# Altium PCB demo.PcbDoc
Units mm, origin at the board's own origin, x right, y up, seen from the top; angles counter-clockwise.
Board outline 100 x 100 mm, 2 copper layers (Top Layer, Bottom Layer); 59 components, 69 nets, 272 pads, 63 vias.
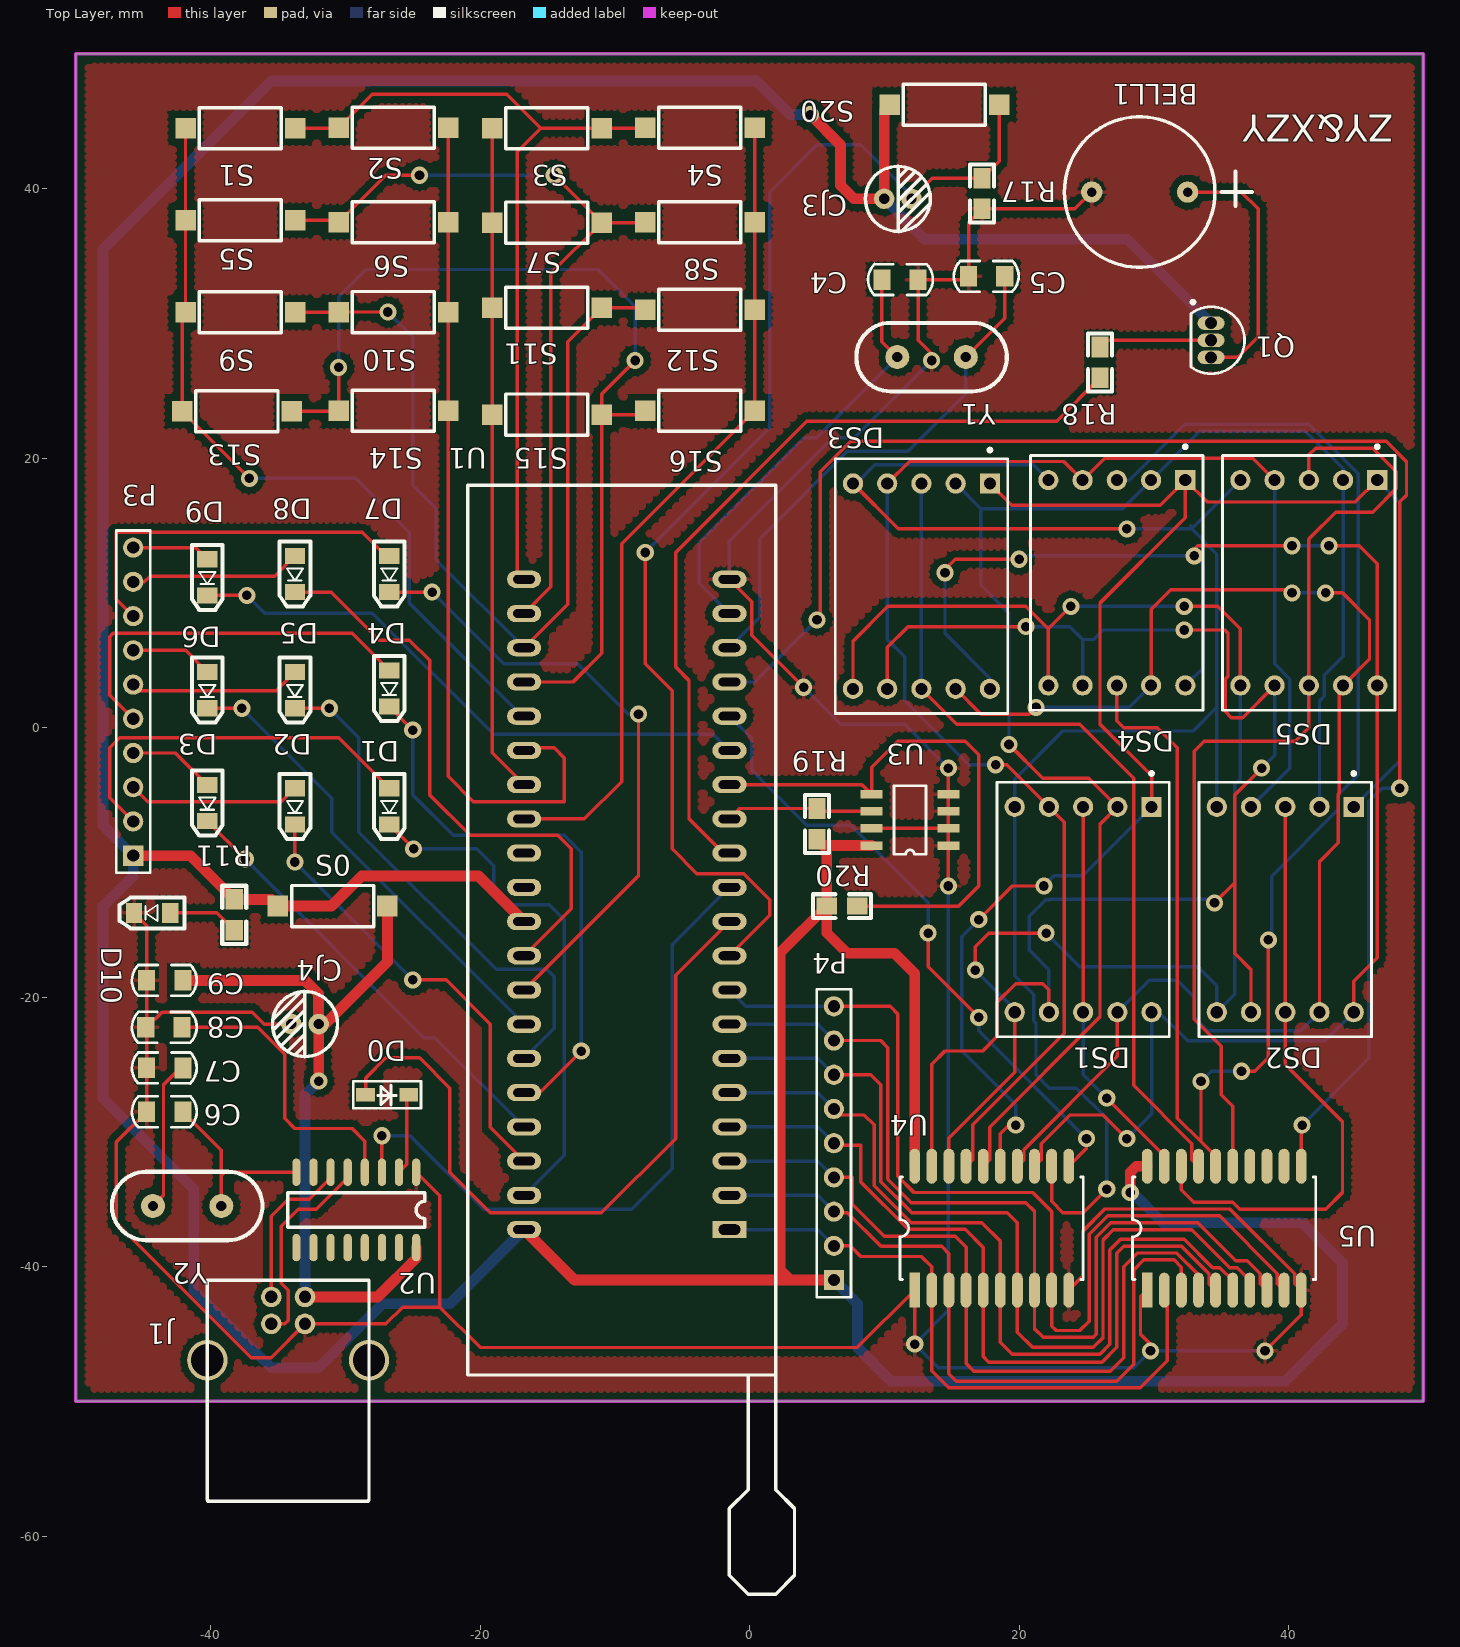
[diagram p0: Top Layer view]
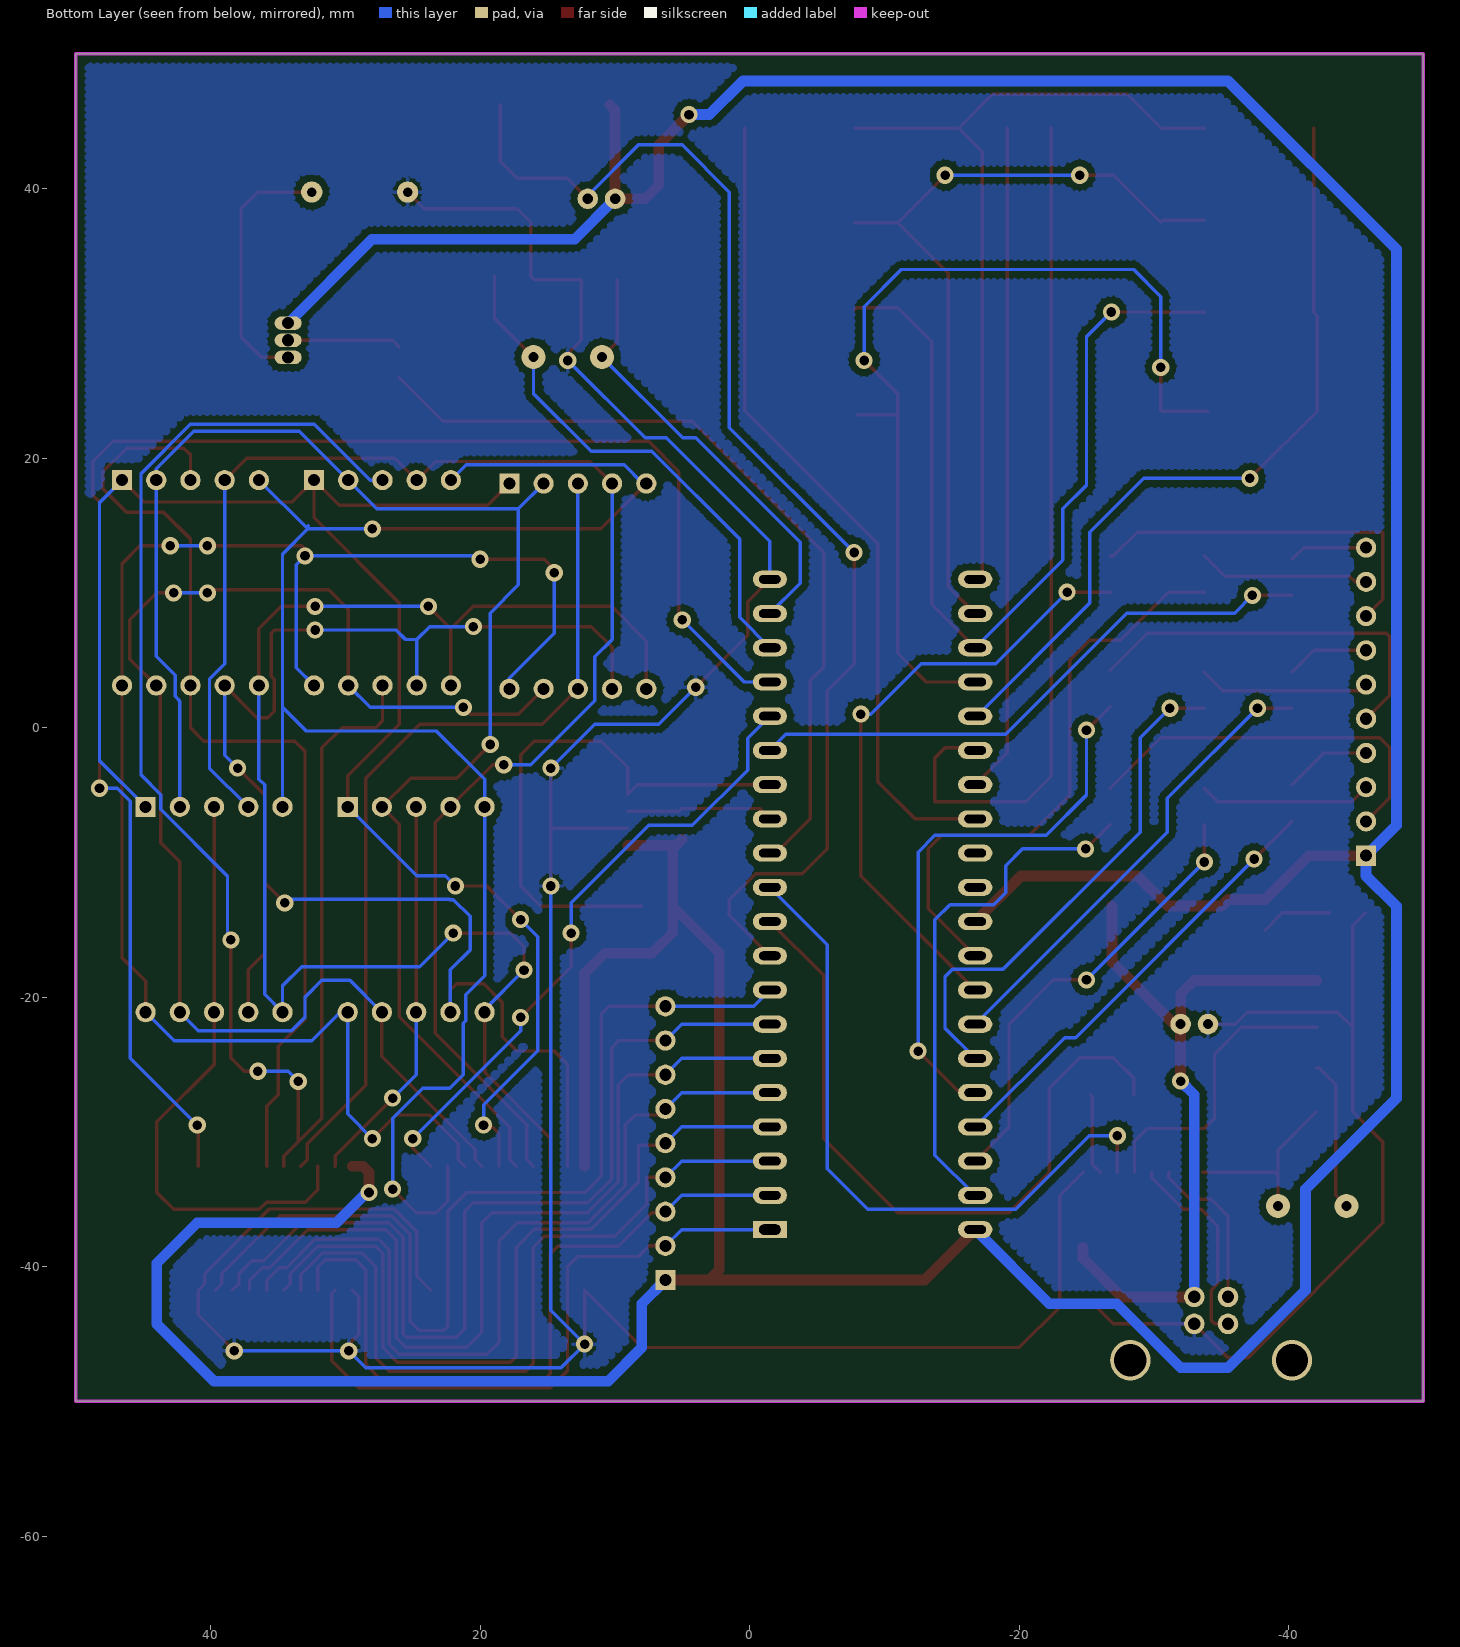
[diagram p1: Bottom Layer view, seen from below]

## Layer stack, top to bottom
Top Layer: signal copper 0.0356
Dielectric: dielectric 0.32, FR-4, Dk 4.8
Bottom Layer: signal copper 0.0356

## Board outline
-50,-50 50,-50 50,50 -50,50

## Design rules (kind name [scope] priority, off if disabled: settings)
Clearance INPOLY [InPoly] p1: gap=0.5
Clearance Clearance_1 [All] p2: gap=0.254
FabricationTestpoint [(IsPad And (OnTopLayer Or OnBottomLayer))] p1: side=3 testpointundercomponent=TRUE minsize=1.016 maxsize=2.54 preferedsize=1.524 minholesize=0 maxholesize=1.016 preferedholesize=0.813 testpointgrid=0.025 allowsidetop=TRUE allowsidebottom=TRUE usegrid=TRUE gridtolerance=0
PolygonConnect [All] p1: connectstyle=Relief reliefconductorwidth=0.254 reliefentries=4 polygonreliefangle="90 Angle" airgapwidth=0.254
RoutingVias [All] p1: holewidth=0.711 width=1.27 viastyle="Through Hole" minholewidth=0.711 minwidth=1.27 maxholewidth=0.711 maxwidth=1.27
SolderMaskExpansion [All] p1: expansion=0.102
Width VCC [InNet('VCC')] p1: maxlimit=2 minlimit=0.254 preferedwidth=0.8
Width +5 [InNet('+5V')] p2: maxlimit=2 minlimit=0.254 preferedwidth=0.8
Width [All] p3: maxlimit=0.254 minlimit=0.1 preferedwidth=0.254
27 further rules are at their usual default settings.

## Components (designator, comment, footprint, x,y, rotation, side; value= is the part's Value field where it differs from the comment)
BELL1 "BELL" BELL 32.5,39.75 r0 top
C4 "Cap" 0805C 12.5,33.25 r180 top
C5 "Cap" 0805C 16.25,33.5 r0 top
C6 "Cap" 0805C -44.75,-28.5 r0 top
C7 "Cap" 0805C -44.75,-25.25 r0 top
C8 "0.01UF" 0805C -42.135,-22.25 r180 top
C9 "0.1UF" 0805C -44.75,-18.75 r0 top
CJ3 "" RB10U 11,39.25 r0 top
CJ4 "" RB10U -33,-22 r180 top
D0 "Diode 1N4148" SOD123F -28.5,-27.25 r0 top
D1 "LED0" 0805-LED -26.75,-4.5 r90 top
D2 "LED0" 0805-LED -33.75,-4.5 r90 top
D3 "LED0" 0805-LED -40.25,-4.25 r90 top
D4 "LED0" 0805-LED -26.75,4.25 r90 top
D5 "LED0" 0805-LED -33.75,4.125 r90 top
D6 "LED0" 0805-LED -40.25,4.125 r90 top
D7 "LED0" 0805-LED -26.75,12.75 r90 top
D8 "LED0" 0805-LED -33.75,12.75 r90 top
D9 "LED0" 0805-LED -40.25,12.5 r90 top
D10 "LED0" 0805-LED -43,-13.75 r0 top
DS1 "Dpy Blue-CA" H 24.75,-13.5 r180 top
DS2 "Dpy Blue-CA" H 39.75,-13.5 r180 top
DS3 "Dpy Blue-CA" H 12.75,10.5 r180 top
DS4 "Dpy Blue-CA" H 27.25,10.75 r180 top
DS5 "Dpy Blue-CA" H 41.5,10.75 r180 top
J1 "USB" USB-B -33,-42.25 r90 top
P3 "1k" HDR1X10 -45.75,-9.5 r90 top
P4 "10K" HDR1X9 6.25,-41 r90 top
Q1 "2N3906" TO-92A 34.25,28.75 r180 top
R11 "Res2" 0805 -38.25,-12.75 r270 top
R17 "Res2" 0805 17.25,38.5 r90 top
R18 "Res2" 0805 26,28.25 r270 top
R19 "10K" 0805 5,-6 r270 top
R20 "10K" 0805 8,-13.25 r180 top
S0 "SW-SPST" SWD -35,-13.25 r0 top
S1 "" SWD -33.75,44.5 r180 top
S2 "" SWD -30.5,44.5 r0 top
S3 "" SWD -11,44.5 r180 top
S4 "" SWD -7.75,44.5 r0 top
S5 "" SWD -33.75,37.667 r180 top
S6 "" SWD -30.5,37.5 r0 top
S7 "" SWD -11,37.5 r180 top
S8 "" SWD -7.75,37.5 r0 top
S9 "" SWD -33.75,30.833 r180 top
S10 "" SWD -30.5,30.833 r0 top
S11 "" SWD -11,31.167 r180 top
S12 "" SWD -7.75,31 r0 top
S13 "" SWD -34,23.5 r180 top
S14 "" SWD -30.5,23.5 r0 top
S15 "" SWD -11,23.25 r180 top
S16 "" SWD -7.75,23.5 r0 top
S20 "" SWD 18.5,46.25 r180 top
U1 "AT89C51" DIP40紧锁座 -1.5,-37.25 r180 top
U2 "CH340G" SO-16 -24.75,-33 r270 top
U3 "24C02" SOP-8 14.75,-8.75 r180 top
U4 "74573" SO20W 12.25,-41.75 r90 top
U5 "74573" SO20W 29.5,-41.75 r90 top
Y1 "11.0592MHZ" XTAL 13.5,27.5 r180 top
Y2 "12MHZ" XTAL -41.75,-35.5 r0 top

## Footprints (in the part's own frame and the unit in brackets; to place one, negate y for a bottom-side part, rotate by r counter-clockwise, add the part's x,y. Pads: shape width x height; smd on the part's side, far side on the other; paste and mask are expansions set on the pad)
0805 [mil]
  rect 60x50 smd: 1(0,0) 2(90,0)
  silkscreen extent -40,-35 130,35
0805-LED [mm]
  rect 1.2x1.5 smd: 1(0,0) 2(-2.686,0)
  silkscreen extent -3.76,-1.14 1.07,1.14
0805C [mil]
  rect 50x60 smd: 1(0,0) 2(105.71,-0.32)
  silkscreen extent -43,-45 146,45
BELL [mil]
  round 62 hole 28: 1(0,0) 2(-280,0)
  silkscreen extent -360,-220 188,220
DIP40紧锁座 [mil]
  rect 100x50 hole 30 slot 62.99 at 0 deg: 1(0,0)
  oval 100x50 hole 25 slot 62.99 at 0 deg: 2(0,-100) 3(0,-200) 4(0,-300) 5(0,-400) 6(0,-500) 7(0,-600) 8(0,-700) 9(0,-800) 10(0,-900) 11(0,-1000) 12(0,-1100) 13(0,-1200) 14(0,-1300) 15(0,-1400) 16(0,-1500) 17(0,-1600) 18(0,-1700) 19(0,-1800) 20(0,-1900) 21(600,-1900) 22(600,-1800) 23(600,-1700) 24(600,-1600) 25(600,-1500) 26(600,-1400) 27(600,-1300) 28(600,-1200) 29(600,-1100) 30(600,-1000) 31(600,-900) 32(600,-800) 33(600,-700) 34(600,-600) 35(600,-500) 36(600,-400) 37(600,-300) 38(600,-200) 39(600,-100) 40(600,0)
  silkscreen extent -190,-2175 765,1065
H [mm] "LED, 7-Segment Display, 14.2 mm, RHD; 10 Leads; Row Space 15.24 mm; Pitch 2.54 mm"
  rect 1.5x1.5 hole 0.9: 1(-5.08,-7.62)
  round 1.5 hole 0.9: 2(-2.54,-7.62) 3(0,-7.62) 4(2.54,-7.62) 5(5.08,-7.62) 6(5.08,7.62) 7(2.54,7.62) 8(0,7.62) 9(-2.54,7.62) 10(-5.08,7.62)
  silkscreen extent -6.4,-10.22 6.4,9.45, body extent -6.4,-9.45 6.4,9.45, height 8.25
HDR1X9 [mm] "Connector; Header; 9 Position"
  rect 1.5x1.5 hole 0.9: 1(0,0)
  round 1.5 hole 0.9: 2(2.54,0) 3(5.08,0) 4(7.62,0) 5(10.16,0) 6(12.7,0) 7(15.24,0) 8(17.78,0) 9(20.32,0)
  silkscreen extent -1.27,-1.27 21.59,1.27
HDR1X10 [mm] "Connector; Header; 10 Position"
  rect 1.5x1.5 hole 0.9: 1(0,0)
  round 1.5 hole 0.9: 2(2.54,0) 3(5.08,0) 4(7.62,0) 5(10.16,0) 6(12.7,0) 7(15.24,0) 8(17.78,0) 9(20.32,0) 10(22.86,0)
  silkscreen extent -1.27,-1.27 24.13,1.27
RB10U [mil]
  round 60 hole 30: 1(-40,0) 2(40,0)
  silkscreen extent -95,-96 95,95
SO20W [mm]
  rect 2.6x0.8 smd: 1(0,0)
  oval 2.6x0.8 smd: 2(0,-1.27) 3(0,-2.54) 4(0,-3.81) 5(0,-5.08) 6(0,-6.35) 7(0,-7.62) 8(0,-8.89) 9(0,-10.16) 10(0,-11.43) 11(9.2,-11.43) 12(9.2,-10.16) 13(9.2,-8.89) 14(9.2,-7.62) 15(9.2,-6.35) 16(9.2,-5.08) 17(9.2,-3.81) 18(9.2,-2.54) 19(9.2,-1.27) 20(9.2,0)
  silkscreen extent 0.8,-12.51 8.4,1.09
SO-16 [mil]
  oval 80x24 smd: 1(0,0) 2(0,-50) 3(0,-100) 4(0,-150) 5(0,-200) 6(0,-250) 7(0,-300) 8(0,-350) 9(220,-350) 10(220,-300) 11(220,-250) 12(220,-200) 13(220,-150) 14(220,-100) 15(220,-50) 16(220,0)
  silkscreen extent 60,-375 160,25
SOD123F [mm]
  rect 1.4x1 smd: 1(0,0) 2(3.2,0)
  silkscreen extent -0.91,-1 4.11,1
SOP-8 [mil]
  rect 65x25 smd: 1(0,0) 2(0,-50) 3(0,-100) 4(0,-150) 5(224.41,-150) 6(224.41,-100) 7(224.41,-50) 8(224.41,0)
  silkscreen extent 65,-175 159,25
SWD [mil]
  rect 60x60 smd: 1(-0.4,0.5) 2(319.6,0.5)
  silkscreen extent 40,-60 280,60
TO-92A [mm] "TO, Flat Index; 3 In-Line, Axial Leads; Body Dia. 4.5mm; Leads 0.51 x 0.48 mm (max)"
  oval 2x1 hole 0.9: 1(0,-1.27) 2(0,0) 3(0,1.27)
  silkscreen extent -2.48,-2.95 1.5,2.48, body extent -2.5,-2.5 1.5,2.5, height 6.86
USB-B [mm]
  round 1.524 hole 0.92: 1(0,0) 2(0,2.5) 3(-2,2.5) 4(-2,0)
  round 3 hole 2.4: 5(-4.7,7.25) 6(-4.7,-4.75)
  silkscreen extent -15.15,-4.75 1.22,7.25
XTAL [mil]
  round 70 hole 30: 1(-100,0) 2(100,0)
  silkscreen extent -220,-100 220,100

## Part data
C4 C5 C6 C7: "Capacitor"
C8 C9: library part Cap, "Capacitor"
CJ3 CJ4: library part "Cap Pol1", "Polarized Capacitor (Radial)"
D0: "High Conductance Fast Diode"
D1 D2 D3 D4 D5 D6 D7 D8 D9 D10: "Typical INFRARED GaAs LED"
DS1 DS2 DS3 DS4 DS5: "14.2 mm General Purpose Blue 7-Segment Display: CA, RH DP, Gray Surface"
P3: library part "Header 10", "Header, 10-Pin"
P4: library part "Header 9", "Header, 9-Pin"
Q1: "PNP General Purpose Amplifier"
R11 R17 R18: "Resistor"
R19 R20: library part Res2, "Resistor"
S0: "Single-Pole, Single-Throw Switch"
S1 S2 S3 S4 S5 S6 S7 S8 S9 S10 S11 S12 S13 S14 S15 S16 S20: library part SW-PB, "Switch"
U2: "USB2UART"
Y1 Y2: library part XTAL, "Crystal Oscillator"

## Via types
v1: diameter 1.27, hole 0.711, Top Layer to Bottom Layer, 63 vias

## Nets (pads, with @x,y where several pads share a name; then routed paths per layer and width w, separated by ;. In a path a pad name is that pad's centre, name@x,y a point inside that pad or via, vN(x,y) a via of type N, cw(c..) or ccw(c..) an arc to the next point about the centre after c; other vN are vias at no path point)
+5V: C9.2 CJ4.1 J1.1 S0.2 U2.16 | length 55.5
  Top Layer w0.8: C9.2 -32.992,-18.758 -32,-19.75 -32,-22.484 CJ4.1@-31.984,-22.468 ; J1.1 -27.615,-42.25 -24.75,-39.385 U2.16 ; v1(-31.984,-26.234) CJ4.1@-31.984,-22.468 ; CJ4.1 CJ4.1@-31.984,-22.468 ; S0.2 -26.882,-17.366 CJ4.1@-31.984,-22.468
  Bottom Layer w0.8: J1.1 -33,-27.25 v1(-31.984,-26.234)
A: DS1.7 DS2.7 DS3.7 DS4.7 DS5.7 U4.19 | length 116.9
  Top Layer w0.254: DS3.7 10.21,5.96 11.75,7.5 v1(20.5,7.5) ; U4.19 13.52,-24.98 14.5,-24 17.3,-24 18.35,-22.95 18.35,-20.4 19.75,-19 21.75,-19 22.21,-19.46 DS1.7 ; v1(32.25,7.25) 35.25,7.25 35.5,7 35.5,3.809 35.289,3.598 35.289,1.211 35.75,0.75 36.58,0.75 DS5.7 ; v1(34.5,-13) 36,-11.5 ; DS2.7 37.21,-17.96 36,-16.75 36,-11.5 ; v1(38,-3) 36,-5 36,-11.5
  Bottom Layer w0.254: v1(20.5,7.5) 20.5,7 21,7.5 23.75,7.5 24.71,6.54 ; DS1.7 22.21,-17.96 20.75,-16.5 20.75,-14 21.984,-12.766 22.257,-12.766 22.273,-12.75 34.25,-12.75 v1(34.5,-13) ; DS4.7 24.71,6.54 ; v1(32.25,7.25) 26.25,7.25 25.54,6.54 24.71,6.54 ; v1(38,-3) 38.96,-2.04 DS5.7
B: DS1.6 DS2.6 DS3.6 DS4.6 DS5.6 U4.18 | length 110.2
  Top Layer w0.254: DS3.6 7.67,6.42 10.25,9 20.5,9 22.17,7.33 ; U4.18 14.79,-30.46 19.67,-25.58 DS1.6 ; v1(16.75,-18) 16.75,-16.25 17.75,-15.25 v1(22,-15.25) ; DS4.6 22.17,7.33 ; v1(23.84,9) 22.17,7.33 ; v1(32.25,9) 34.75,9 36.42,7.33 DS5.6
  Bottom Layer w0.254: v1(16.75,-18) 19.67,-20.92 DS1.6 ; v1(22,-15.25) 24.5,-17.75 33.25,-17.75 34.67,-19.17 DS2.6 36,-19.79 36,-4.25 36.42,-3.83 DS5.6 ; v1(23.84,9) v1(32.25,9)
C: DS1.4 DS2.4 DS3.4 DS4.4 DS5.4 U4.17 | length 118.2
  Top Layer w0.254: DS3.4 11.84,19.75 23.33,19.75 DS4.4 26.34,20 37.33,20 DS5.4 ; U4.17 16.549,-32.061 16.549,-29.483 23.341,-22.691 23.341,-7.011 DS1.4 ; v1(18.25,-2.75) 19.08,-2.75 DS1.4 ; DS1.4@22.37,-5.88 DS1.4
  Bottom Layer w0.254: DS3.4 10.21,6.54 11.5,5.25 11.5,2 16.25,-2.75 v1(18.25,-2.75) ; DS2.4 40.091,-2.999 40.091,3.598 38.96,4.729 DS5.4
CH_D+: J1.3 U2.5 | length 15.4
  Top Layer w0.254: J1.3 -34.5,-44.25 -34.25,-44 -34.25,-41.75 -34.75,-41.25 -34.75,-37 -33.5,-35.75 -32.169,-35.75 -29.83,-33.411 U2.5
CH_D-: J1.2 U2.6 | length 12
  Top Layer w0.254: J1.2 -35.5,-36.25 -34.25,-35 -32.689,-35 -31.1,-33.411 U2.6
CH_TXD: D0.2 U2.2 | length 6
  Top Layer w0.254: U2.2 -25.436,-32.416 -25.436,-27.386 D0.2
D: DS1.2 DS2.2 DS3.2 DS4.2 DS5.2 U4.16 | length 118
  Top Layer w0.254: U4.16 17.819,-32.061 17.819,-29.65 26,-21.469 26,-7.17 DS1.2 25.16,-3.75 21.75,-3.75 v1(19.25,-1.25)
  Bottom Layer w0.254: DS3.2 17.16,16.25 ; v1(19.25,-1.25) 19.25,8.5 17.16,10.59 17.16,16.25 ; DS2.2 42.29,1.979 42.631,2.321 42.631,3.881 44.04,5.29 DS5.2 44.04,19.21 41.25,22 33.42,22 DS4.2 27.67,16.25 17.16,16.25
DP: DS1.5 DS2.5 DS3.5 DS4.5 DS5.5 U4.12 | length 128.2
  Top Layer w0.254: DS3.5 11.04,14.75 v1(28,14.75) ; U4.12 22.41,-35.16 23.25,-36 24.75,-36 v1(26.5,-34.25)
  Bottom Layer w0.254: DS3.5 7.92,18.12 9.3,19.5 21.04,19.5 DS4.5 ; v1(26.5,-34.25) 26.5,-29 24.25,-26.75 22.25,-26.75 21.25,-25.75 21.25,-21.93 21.079,-21.759 21.079,-19.829 19.67,-18.42 DS1.5 19.67,-3.83 23.25,-0.25 32.92,-0.25 34.67,1.5 ; v1(28,14.75) 32.75,14.75 ; 32.75,15 32.8,14.95 32.8,14.75 ; DS2.5 34.67,1.5 ; DS5.5 32.8,14.75 ; 32.8,14.75 34.67,12.88 34.67,1.5
DS1: DS1.3 DS1.8 U5.19 | length 29.2
  Top Layer w0.254: DS1.8 DS1.3 ; v1(26.5,-27.5) 30.77,-31.77 U5.19
  Bottom Layer w0.254: DS1.8 24.75,-25.75 v1(26.5,-27.5)
DS2: DS2.3 DS2.8 U5.18 | length 45.2
  Top Layer w0.254: U5.18 32.04,-34.29 32.968,-35.218 35.851,-35.218 36.383,-35.75 42.75,-35.75 44,-34.5 44,-29.25 39.75,-25 DS2.8 DS2.3
DS3: DS3.3 DS3.8 U5.17 | length 64.5
  Top Layer w0.254: DS3.8 15.38,0.25 24.5,0.25 28.5,-3.75 28.5,-26.548 32.821,-30.869 32.821,-32.061 U5.17
  Bottom Layer w0.254: DS3.8 DS3.3
DS4: DS4.3 DS4.8 U5.16 | length 117.8
  Top Layer w0.254: DS4.8 27.25,0.5 27.75,0 30.25,0 31.75,-1.5 31.75,-28.986 33.5,-30.735 ; v1(33.5,-26.25) 33.5,-30.735 ; U5.16 34.58,-31.815 33.5,-30.735 ; v1(36.5,-25.5) 37.5,-25.5 38.5,-24.5 v1(38.5,-15.75)
  Bottom Layer w0.254: DS4.3 28.161,18.37 32.299,22.508 41.501,22.508 45.171,18.838 45.171,-3.5 43.699,-4.972 43.699,-6.07 38.75,-11.019 38.75,-15.75 v1(38.5,-15.75) ; v1(33.5,-26.25) 34.25,-25.5 v1(36.5,-25.5)
DS5: DS5.3 DS5.8 U5.15 | length 73.8
  Top Layer w0.254: U5.15 35.85,-28.1 35,-27.25 35,-23.65 33,-21.65 33,-1.75 33.75,-1 40.5,-1 41.5,0 DS5.8 41.5,14 43.5,16 46.249,16 48,17.751 48,18.989 46.239,20.75 42,20.75 41.5,20.25 DS5.3
E: DS1.1 DS2.1 DS3.1 DS4.1 DS5.1 U4.15 | length 124.1
  Top Layer w0.254: v1(17,-14.25) 19.5,-11.75 v1(21.836,-11.75) ; DS3.1 19.45,16.5 30.46,16.5 DS4.1 ; U4.15 18.6,-30.15 19.5,-29.25 v1(19.75,-29.5) ; DS1.1 29.83,-3.58 26,0.25 26,9.25 32.33,15.58 DS4.1 ; DS5.1 44.96,16.75 33.95,16.75 DS4.1
  Bottom Layer w0.254: v1(17,-14.25) 15.734,-15.516 15.734,-23.984 19.75,-28 v1(19.75,-29.5) ; v1(21.836,-11.75) 22.586,-11 24.71,-11 DS1.1 ; DS2.1 48.25,-2.46 48.25,16.7 DS5.1
F: DS1.9 DS2.9 DS3.9 DS4.9 DS5.9 U4.14 | length 104.2
  Top Layer w0.254: DS3.9 17.17,1 20.75,1 v1(21.25,1.5) ; U4.14 20.359,-32.061 20.359,-31.326 27.29,-24.395 DS1.9 ; DS4.9 29.79,8.79 31.25,10.25 40.5,10.25 v1(40.25,10) ; DS2.9 42.29,-9.96 43.699,-8.551 43.699,-4.921 43.75,-4.87 43.75,2.84 DS5.9 46,5.09 46,8 44,10 v1(42.75,10)
  Bottom Layer w0.254: v1(21.25,1.5) 28.16,1.5 DS4.9 ; DS1.9 29.66,-18.75 31.75,-18.75 33,-20 33,-21.5 34,-22.5 40.91,-22.5 DS2.9 ; v1(40.25,10) v1(42.75,10)
G: DS1.10 DS2.10 DS3.10 DS4.10 DS5.10 U4.13 | length 125.1
  Top Layer w0.254: v1(14.5,11.5) 14.5,11.75 15.25,12.5 v1(20,12.5) ; U4.13 21.629,-32.061 21.629,-30.871 23.75,-28.75 26.25,-28.75 v1(28,-30.5) ; v1(33,12.75) 33,13.25 33.25,13.5 v1(40.25,13.5) ; v1(43,13.5) 45.25,13.5 46.58,12.17 DS5.10 46.58,-17.07 44.83,-18.82 DS2.10
  Bottom Layer w0.254: v1(14.5,11.5) 14.5,7 17.83,3.67 DS3.10 ; v1(20,12.5) 20.25,12.75 v1(33,12.75) 33.65,12.1 33.65,4.45 DS4.10 ; v1(28,-30.5) 29.83,-28.67 DS1.10 30.37,-21.12 32.5,-23.25 42.7,-23.25 DS2.10 ; v1(40.25,13.5) v1(43,13.5)
GND: BELL1.2 C4.1 C5.1 C6.1 C7.1 C8.2 C9.1 CJ4.2 D10.2 J1.4 R17.1 U1.20 U2.1 U3.1 U3.2 U3.3 U3.4 U3.7 U4.1 U4.10 U5.1 U5.10 | length 301.8
  Top Layer w0.254: D10.2 -44.75,-14.686 C9.1 C8.2@-44.75,-22.242 ; CJ4.2 -36.032,-22 -36.925,-21.107 -43.615,-21.107 C8.2@-44.75,-22.242 ; U2.1 -23,-34.75 -23,-43 ; U1.20 0.151,9.359 0.151,6.849 v1(4,3) ; U3.7 U3.2 ; v1(12.25,-45.75) U4.1 8,-46 -20,-46 -23,-43 ; v1(13.5,27.25) 13.5,27.75 12.5,28.75 C4.1 16,33.25 C5.1 16.25,37.5 R17.1 24.138,38.5 BELL1.2 ; v1(14.75,-11.75) U3.1 U3.2 ; v1(14.75,-3) U3.4 U3.3 U3.2 ; U4.10 24.702,-40.728 24.702,-37.393 26.369,-35.726 35.641,-35.726 40.441,-40.526 40.441,-41.261 U5.10 40.93,-43.57 v1(38.25,-46.25) ; U5.1 29.008,-42.242 29.008,-45.008 29.75,-45.75 v1(29.75,-46.25) ; C8.2@-44.75,-22.242 C7.1 C6.1 -47,-30.75 -47,-36.75 -37,-46.75 -35.5,-46.75 J1.4 -27,-44.25 -25.75,-43 -23,-43
  Bottom Layer w0.254: U1.20 -1.5,13.821 6.179,21.5 7.75,21.5 v1(13.5,27.25) ; v1(4,3) 6.75,0.25 11.5,0.25 v1(14.75,-3) ; v1(14.75,-11.75) 14.75,-43.25 v1(12.25,-45.75) 14,-47.5 28.5,-47.5 v1(29.75,-46.25) v1(38.25,-46.25)
NetBELL1_1: BELL1.1 Q1.3 | length 19.4
  Top Layer w0.254: BELL1.1 36.5,39.75 37.75,38.5 37.75,29 36.23,27.48 Q1.3
NetC6_2: C6.2 U2.8 Y2.2 | length 13.8
  Top Layer w0.254: C6.2 -39.21,-31.363 -39.21,-33.25 ; Y2.2 -39.21,-33.25 ; U2.8 -38.96,-33 -39.21,-33.25
NetC7_2: C7.2 Y2.1 | length 11.3
  Top Layer w0.254: Y2.1 -43.5,-34.71 -43.5,-26.5 -42.258,-25.258 C7.2
NetC8_1: C8.1 U2.4 | length 22.2
  Top Layer w0.254: C8.1 -36.5,-22.25 -34.5,-24.25 -34.5,-29 -33.75,-29.75 -29.5,-29.75 -28.56,-30.69 U2.4
NetD1_1: D1.1 P3.2 | length 28.8
  Top Layer w0.254: P3.2 -47.5,-5.21 -47.5,-1.498 -46.751,-0.749 -30.501,-0.749 D1.1
NetD2_1: D2.1 P3.3 | length 12.9
  Top Layer w0.254: P3.3 -44.67,-5.5 -34.75,-5.5 D2.1
NetD3_1: D3.1 P3.4 | length 6.5
  Top Layer w0.254: P3.4 -42.62,-1.88 D3.1
NetD4_1: D4.1 P3.5 | length 28.8
  Top Layer w0.254: P3.5 -47.5,2.41 -47.5,6.75 -47.25,7 -29.5,7 D4.1
NetD5_1: D5.1 P3.6 | length 12.8
  Top Layer w0.254: P3.6 -45.3,2.75 -35.125,2.75 D5.1
NetD6_1: D6.1 P3.7 | length 6.2
  Top Layer w0.254: P3.7 -41.865,5.74 D6.1
NetD7_1: D7.1 P3.8 | length 27.7
  Top Layer w0.254: P3.8 -47,9.53 -47,14.5 -28.75,14.5 -27,12.75 D7.1
NetD8_1: D8.1 P3.9 | length 12.8
  Top Layer w0.254: P3.9 -44.93,10.82 -44.5,11.25 -35.25,11.25 D8.1
NetD9_1: D9.1 P3.10 | length 5.9
  Top Layer w0.254: P3.10 -41.11,13.36 D9.1
NetD10_1: D10.1 R11.2 | length 5.3
  Top Layer w0.254: D10.1 -39.536,-13.75 R11.2
NetQ1_2: Q1.2 R18.1 | length 8.5
  Top Layer w0.254: R18.1 26.5,28.75 Q1.2
P0.0: D1.2 U1.39 | length 38.8
  Top Layer w0.254: D1.2 v1(-24.936,-9)
  Bottom Layer w0.254: v1(-24.936,-9) -20.25,-9 -19,-10.25 -19,-12.25 -18.12,-13.13 -14.87,-13.13 -13.75,-14.25 -13.75,-31.72 U1.39
P0.1: D2.2 U1.38 | length 33.5
  Top Layer w0.254: v1(-33.75,-9.969) D2.2 ; v1(-25,-18.719) -22.531,-18.719 -19.25,-22 -19.25,-29.66 U1.38
  Bottom Layer w0.254: v1(-33.75,-9.969) v1(-25,-18.719)
P0.2: D3.2 U1.37 | length 32.9
  Top Layer w0.254: D3.2 v1(-37.436,-9.75)
  Bottom Layer w0.254: v1(-37.436,-9.75) -24.186,-23 -23.37,-23 U1.37
P0.3: D4.2 U1.36 | length 41.8
  Top Layer w0.254: D4.2 v1(-25,-0.186) ; U1.36 -15.582,-27.09 v1(-12.5,-24.008)
  Bottom Layer w0.254: v1(-25,-0.186) -25,-5 -22,-8 -13.75,-8 -12.5,-9.25 v1(-12.5,-24.008)
P0.4: D5.2 U1.35 | length 38.6
  Top Layer w0.254: D5.2 v1(-31.189,1.439)
  Bottom Layer w0.254: v1(-31.189,1.439) -29,-0.75 -29,-7.75 -18.804,-17.946 -15.054,-17.946 -14.5,-18.5 -14.5,-22.31 U1.35
P0.5: D6.2 U1.34 | length 34.7
  Top Layer w0.254: D6.2 v1(-37.689,1.439)
  Bottom Layer w0.254: v1(-37.689,1.439) -31,-5.25 -31,-7.75 U1.34
P0.6: D7.2 U1.33 | length 46.2
  Top Layer w0.254: D7.2 v1(-23.564,10.064) ; U1.33 -8.25,-10.98 v1(-8.25,1)
  Bottom Layer w0.254: v1(-23.564,10.064) -18.25,4.75 -12.75,4.75 -9,1 v1(-8.25,1)
P0.7: D8.2 U1.32 | length 43.6
  Top Layer w0.254: D8.2 -31.064,10.064 -27.5,6.5 -25.25,6.5 -23.75,5 -23.75,-5 -20.75,-8 -14.25,-8 -13.25,-9 -13.25,-13.44 U1.32
P1.0: P4.2 U1.1 U4.2 U5.2 | length 48.1
  Top Layer w0.254: P4.2 7.46,-38.46 8.25,-39.25 12.75,-39.25 13.52,-40.02 U4.2 13.52,-47.73 14.79,-49 29,-49 31,-47 31,-41.98 U5.2
  Bottom Layer w0.254: U1.1 5.04,-37.25 P4.2
P1.1: P4.3 U1.2 U4.3 U5.3 | length 54.2
  Top Layer w0.254: P4.3 6.33,-36 7.25,-36 9.75,-38.5 14.25,-38.5 14.79,-39.04 U4.3 14.79,-47.96 15.322,-48.492 27.258,-48.492 28.5,-47.25 28.5,-40.25 29.25,-39.5 31.5,-39.5 32.04,-40.04 U5.3
  Bottom Layer w0.254: U1.2 5.04,-34.71 P4.3
P1.2: P4.4 U1.3 U4.4 U5.4 | length 56.9
  Top Layer w0.254: P4.4 7.622,-33.38 7.622,-35.372 10,-37.75 15.25,-37.75 16.06,-38.56 U4.4 16.06,-47.19 16.62,-47.75 26.75,-47.75 27.75,-46.75 27.75,-40 28.758,-38.992 31.71,-38.992 33.31,-40.592 U5.4
  Bottom Layer w0.254: U1.3 5.04,-32.17 P4.4
P1.3: P4.5 U1.4 U4.5 U5.5 | length 59.1
  Top Layer w0.254: P4.5 6.41,-31 8.25,-31 8.25,-33.718 11.774,-37.242 15.992,-37.242 17.33,-38.58 U4.5 17.33,-46.67 17.75,-47.09 26.152,-47.09 27.242,-46 27.242,-39.008 27.766,-38.484 32.049,-38.484 34.091,-40.526 34.091,-41.261 U5.5
  Bottom Layer w0.254: U1.4 5.04,-29.63 P4.5
P1.4: P4.6 U1.5 U4.6 U5.6 | length 62
  Top Layer w0.254: P4.6 6.7,-28.75 8.5,-28.75 9.234,-29.484 9.234,-33.984 11.516,-36.266 ; 11.516,-36.266 11.984,-36.734 17.234,-36.734 18.6,-38.1 U4.6 18.6,-45.6 19.5,-46.5 26,-46.5 26.734,-45.766 26.734,-38.766 27.524,-37.976 32.259,-37.976 34.352,-40.069 34.904,-40.069 35.85,-41.015 U5.6
  Bottom Layer w0.254: U1.5 5.04,-27.09 P4.6
P1.5: P4.7 U1.6 U4.7 U5.7 | length 66.6
  Top Layer w0.254: P4.7 9.002,-25.76 9.742,-26.5 9.742,-33.71 11.79,-35.758 12.032,-36 19.12,-36 19.87,-36.75 U4.7 19.87,-44.87 20.992,-45.992 25.508,-45.992 26.226,-45.274 26.226,-38.024 27,-37.25 32.803,-37.25 35.622,-40.069 36.174,-40.069 37.12,-41.015 U5.7
  Bottom Layer w0.254: U1.6 5.04,-24.55 P4.7
P1.6: P4.8 U1.7 U4.8 U5.8 | length 70.6
  Top Layer w0.254: P4.8 9.72,-23.22 10.25,-23.75 10.25,-33.5 12,-35.25 20.5,-35.25 21.14,-35.89 U4.8 21.14,-44.61 21.78,-45.25 25.5,-45.25 25.718,-45.032 25.718,-37.814 26.79,-36.742 33.242,-36.742 36.061,-39.561 36.936,-39.561 37.901,-40.526 37.901,-41.261 U5.8
  Bottom Layer w0.254: U1.7 5.04,-22.01 P4.8
P1.7: P4.9 U1.8 U4.9 U5.9 | length 73.7
  Top Layer w0.254: P4.9 10.43,-20.68 11,-21.25 11,-33.304 12.196,-34.5 21,-34.5 22.41,-35.91 U4.9 22.41,-44.41 22.742,-44.742 24.508,-44.742 25.21,-44.04 25.21,-37.603 26.579,-36.234 34.879,-36.234 39.171,-40.526 39.171,-41.261 U5.9
  Bottom Layer w0.254: U1.8 -0.29,-20.68 P4.9
P2.0: S1.1 S2.1 S3.1 S4.1 U1.21 | length 62.4
  Top Layer w0.254: S1.1 S2.1@-30.536,44.487 ; S2.1 -28.023,47 -18.025,47 -15.513,44.487 ; U1.21 -17.25,11.52 -17.25,42.75 -15.513,44.487 ; S4.1@-7.786,44.487 S3.1 -15.513,44.487
P2.1: S5.1 S6.1 S7.1 S8.1 U1.22 | length 60.1
  Top Layer w0.254: S5.1 S6.1@-30.651,37.654 ; S6.1 -27.023,41 v1(-24.5,41) ; U1.22 -14.75,10.46 -14.75,33.727 S7.1 ; v1(-14.503,41) S7.1 ; S8.1 -7.786,37.487 S7.1
  Bottom Layer w0.254: v1(-24.5,41) v1(-14.503,41)
P2.2: S9.1 S10.1 S11.1 S12.1 U1.23 | length 66.9
  Top Layer w0.254: S9.1 S10.1@-30.536,30.821 ; S10.1 v1(-26.846,30.846) ; U1.23 -13.5,9.17 -13.5,28.644 S11.1 -7.901,31.154 S12.1
  Bottom Layer w0.254: v1(-26.846,30.846) -25,29 -25,18 -23.25,16.25 -23.25,12.44 U1.23
P2.3: S13.1 S14.1 S15.1 S16.1 U1.24 | length 72.3
  Top Layer w0.254: S13.1 S14.1@-30.536,23.487 ; S14.1 v1(-30.51,26.74) ; U1.24 -13.11,3.39 -10.99,5.51 S15.1 ; v1(-8.5,27.25) -10.99,24.76 S15.1 ; S16.1@-8.035,23.237 S15.1
  Bottom Layer w0.254: v1(-30.51,26.74) -30.51,31.99 -28.5,34 -11.25,34 -8.5,31.25 v1(-8.5,27.25)
P2.4: S1.2 S5.2 S9.2 S13.2 U1.25 | length 59
  Top Layer w0.254: S1.2 S9.2 -42.118,30.571 S13.2 v1(-37.131,18.5)
  Bottom Layer w0.254: v1(-37.131,18.5) -29.25,18.5 -25.25,14.5 -25.25,9.25 U1.25@-16.75,0.75
P2.5: S2.2 S6.2 S10.2 S14.2 U1.26 | length 64.2
  Top Layer w0.254: S2.2 S10.2 S14.2 -22.382,-3.618 -20.5,-5.5 -13.75,-5.5 -13.75,-2.25 -14.5,-1.5 -16.55,-1.5 U1.26
P2.6: S3.2 S7.2 S11.2 S15.2 U1.27 | length 49.7
  Top Layer w0.254: S3.2 S11.2 S15.2 -19.118,-1.852 U1.27
P2.7: S4.2 S8.2 S12.2 S16.2 U1.28 | length 61
  Top Layer w0.254: U1.28 -12.27,-6.77 -9.5,-4 -9.5,13.645 S16.2 S4.2
P3.0/RXD: D0.1 U1.10 | length 53.3
  Top Layer w0.254: D0.1 -28.5,-26 -27,-24.5 -24.5,-24.5 -22.25,-26.75 -22.25,-33 -19.25,-36 -11,-36 -5.5,-30.5 -5.5,-18.39 U1.10
P3.1/TXD: U1.11 U2.3 | length 50.4
  Top Layer w0.254: U2.3 v1(-27.29,-30.29)
  Bottom Layer w0.254: v1(-27.29,-30.29) -25.21,-30.29 -19.75,-35.75 -8.75,-35.75 -5.75,-32.75 -5.75,-16.1 U1.11
P3.2: R18.2 U1.12 | length 61.1
  Top Layer w0.254: U1.12 -1.94,-9.31 -4.5,-6.75 -4.5,3.5 -5.5,4.5 -5.5,13 4.25,22.75 22.786,22.75 R18.2
P3.3: R19.1 U1.13 U3.6 | length 11
  Top Layer w0.254: U1.13 -0.73,-6 R19.1 5.21,-6.21 U3.6
P3.4: R20.1 U1.14 U3.5 | length 41.4
  Top Layer w0.254: U1.14 8.34,-4.23 U3.5 9.05,-2.95 11,-1 16,-1 17,-2 17,-11.75 15.5,-13.25 R20.1
P3.5: D9.2 U1.15 | length 43.5
  Top Layer w0.254: D9.2 v1(-37.314,9.814)
  Bottom Layer w0.254: v1(-37.314,9.814) -36,8.5 -28,8.5 -19,-0.5 -2.69,-0.5 U1.15
P3.6: U1.16 U4.11 | length 46.8
  Top Layer w0.254: v1(13.25,-15.25) 13.25,-17.75 v1(17,-21.5) ; U4.11 25,-31.23 v1(25,-30.5)
  Bottom Layer w0.254: U1.16 0.151,-0.801 0.151,-3.151 4.25,-7.25 7.5,-7.25 13.25,-13 v1(13.25,-15.25) ; v1(17,-21.5) 17,-22.5 v1(25,-30.5)
P3.7: U1.17 U5.11 | length 120.9
  Top Layer w0.254: v1(5,8) 5.25,8.25 5.25,19 7.5,21.25 41.782,21.25 41.79,21.258 47.242,21.258 48.75,19.75 48.75,17.25 48.25,16.75 v1(48.25,-4.5) ; U5.11 40.93,-29.57 v1(41,-29.5)
  Bottom Layer w0.254: U1.17 0.39,3.39 v1(5,8) ; v1(41,-29.5) 45.961,-24.539 45.961,-5.467 46.928,-4.5 v1(48.25,-4.5)
RST: CJ3.2 R17.2 S20.1 U1.9 | length 93.2
  Top Layer w0.254: v1(-7.75,13) -7.75,4.75 -5.75,2.75 -5.75,-9 -3.916,-10.834 -0.444,-10.834 1.5,-12.778 1.5,-13.93 U1.9 ; CJ3.2 13.552,40.786 R17.2 18.51,42.046 S20.1
  Bottom Layer w0.254: v1(-7.75,13) 1.5,22.25 1.5,39.75 5,43.25 8.25,43.25 12.016,39.484 CJ3.2
VCC: CJ3.1 P3.1 P4.1 Q1.1 R11.1 R19.2 R20.2 S0.1 S20.2 U1.31 U1.40 U3.8 U4.20 U5.20 | length 406.5
  Top Layer w0.8: P3.1 -41.5,-9.5 R11.1 -35.497,-12.75 S0.1 -31.024,-13.237 -28.787,-11 -20.13,-11 U1.31 ; U1.40 -12.99,-41 3,-41 ; v1(4.5,45.5) 6.75,43.25 6.75,40.25 7.75,39.25 CJ3.1 9.984,45.839 S20.2 ; R19.2 R19.2@5.464,-8.75 ; P4.1 3,-41 ; U3.8 R19.2@5.464,-8.75 ; U4.20 12.25,-18.25 10.75,-16.75 7.25,-16.75 5.714,-15.214 R20.2 ; v1(28.25,-34.5) 28.25,-33 28.7,-32.55 U5.20 ; 3,-41 2.25,-40.25 2.25,-16.714 R20.2 ; R19.2@5.464,-8.75 5.714,-9 R20.2
  Bottom Layer w0.8: U1.40 -22.24,-42.75 -27.25,-42.75 -32,-47.5 -35.5,-47.5 -41.25,-41.75 -41.25,-34.25 -48,-27.5 -48,-13.25 -45.75,-11 P3.1 -48,-7.25 -48,35.5 -35.5,48 0.5,48 3,45.5 v1(4.5,45.5) ; P4.1 8,-42.75 8,-46 10.5,-48.5 39.75,-48.5 44,-44.25 44,-39.75 41,-36.75 30.665,-36.75 28.415,-34.5 v1(28.25,-34.5) ; CJ3.1 12.984,36.25 28.02,36.25 Q1.1
XTAL1: C4.2 U1.19 Y1.2 | length 32.8
  Top Layer w0.254: C4.2 9.815,28.645 Y1.2
  Bottom Layer w0.254: U1.19 -3.75,10.72 -3.75,13.75 4,21.5 4.96,21.5 Y1.2
XTAL2: C5.2 U1.18 Y1.1 | length 38.7
  Top Layer w0.254: Y1.1 18.935,30.395 C5.2
  Bottom Layer w0.254: U1.18 0.75,8.18 0.75,14 7.25,20.5 11.75,20.5 16.04,24.79 Y1.1
pads on no net: J1.5 J1.6 U1.29 U1.30 U2.7 U2.9 U2.10 U2.11 U2.12 U2.13 U2.14 U2.15 U5.12 U5.13 U5.14

## Polygon pours and split planes (outlines as drawn)
GND on Top Layer "Bottom Layer-No Net" (hatched 90Degree grid 0.508 track 0.6, remove dead copper, pour order 4): -59,56 -58.5,56.5 68,56.5 68,-42.25 51,-59.25 49,-57.25 -62.75,-57.25
GND on Bottom Layer "Bottom Layer-No Net" (hatched 90Degree grid 0.508 track 0.6, remove dead copper, pour order 6): -56,53 57,53 61,49 55.5,43.5 55.5,-57.75 -56.5,-57.75 -60.75,-53.5

## Keep-outs
Keep-Out Layer:
  the board outline again, w0.254

## Silkscreen, mask and mechanical layers (free items; w line width, h text height)
Top Overlay:
  text "ZY&XZY" at 47.75,45.5 h2 r180